# Altium PCB PCB_uz_ext_voltage_measurement_800v.PcbDoc
Units mm, origin at the board's own origin, x right, y up, seen from the top; angles counter-clockwise.
Board outline 124 x 82.6 mm, 2 copper layers (Top Copper, Bottom Copper), stack 1.57 mm thick; 52 components, 22 nets, 189 pads, 25 vias.
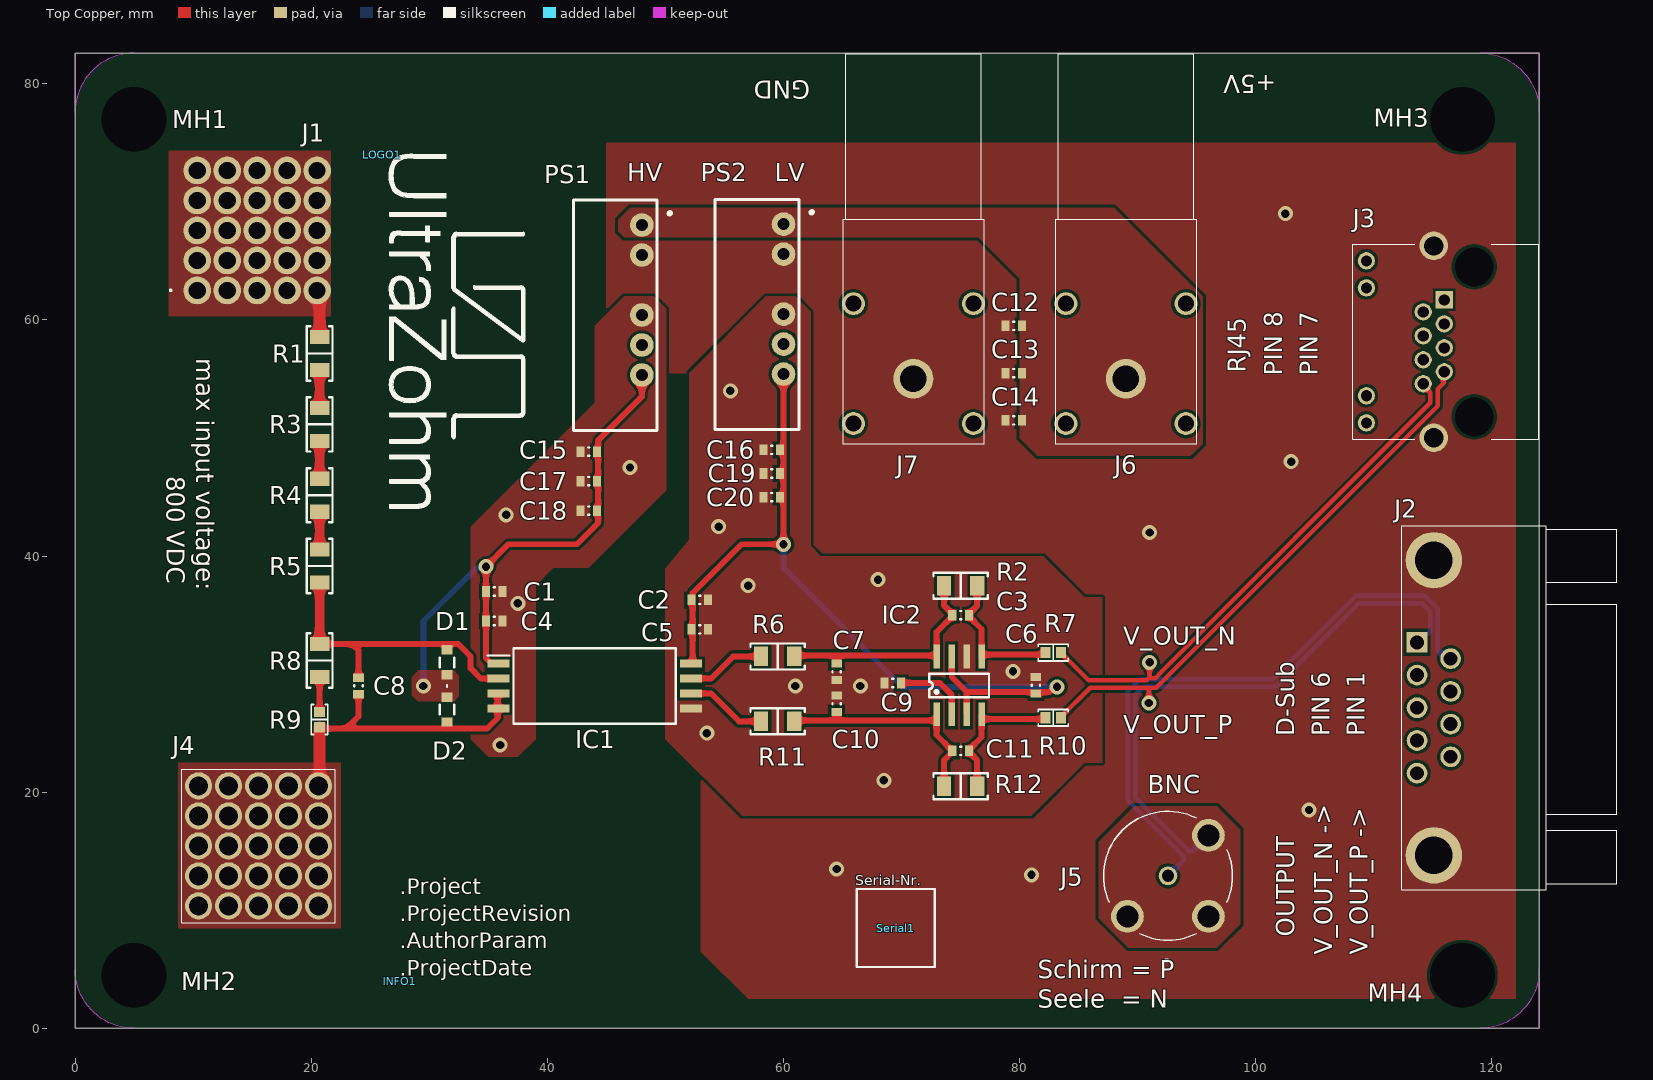
[diagram p0: Top Copper view]
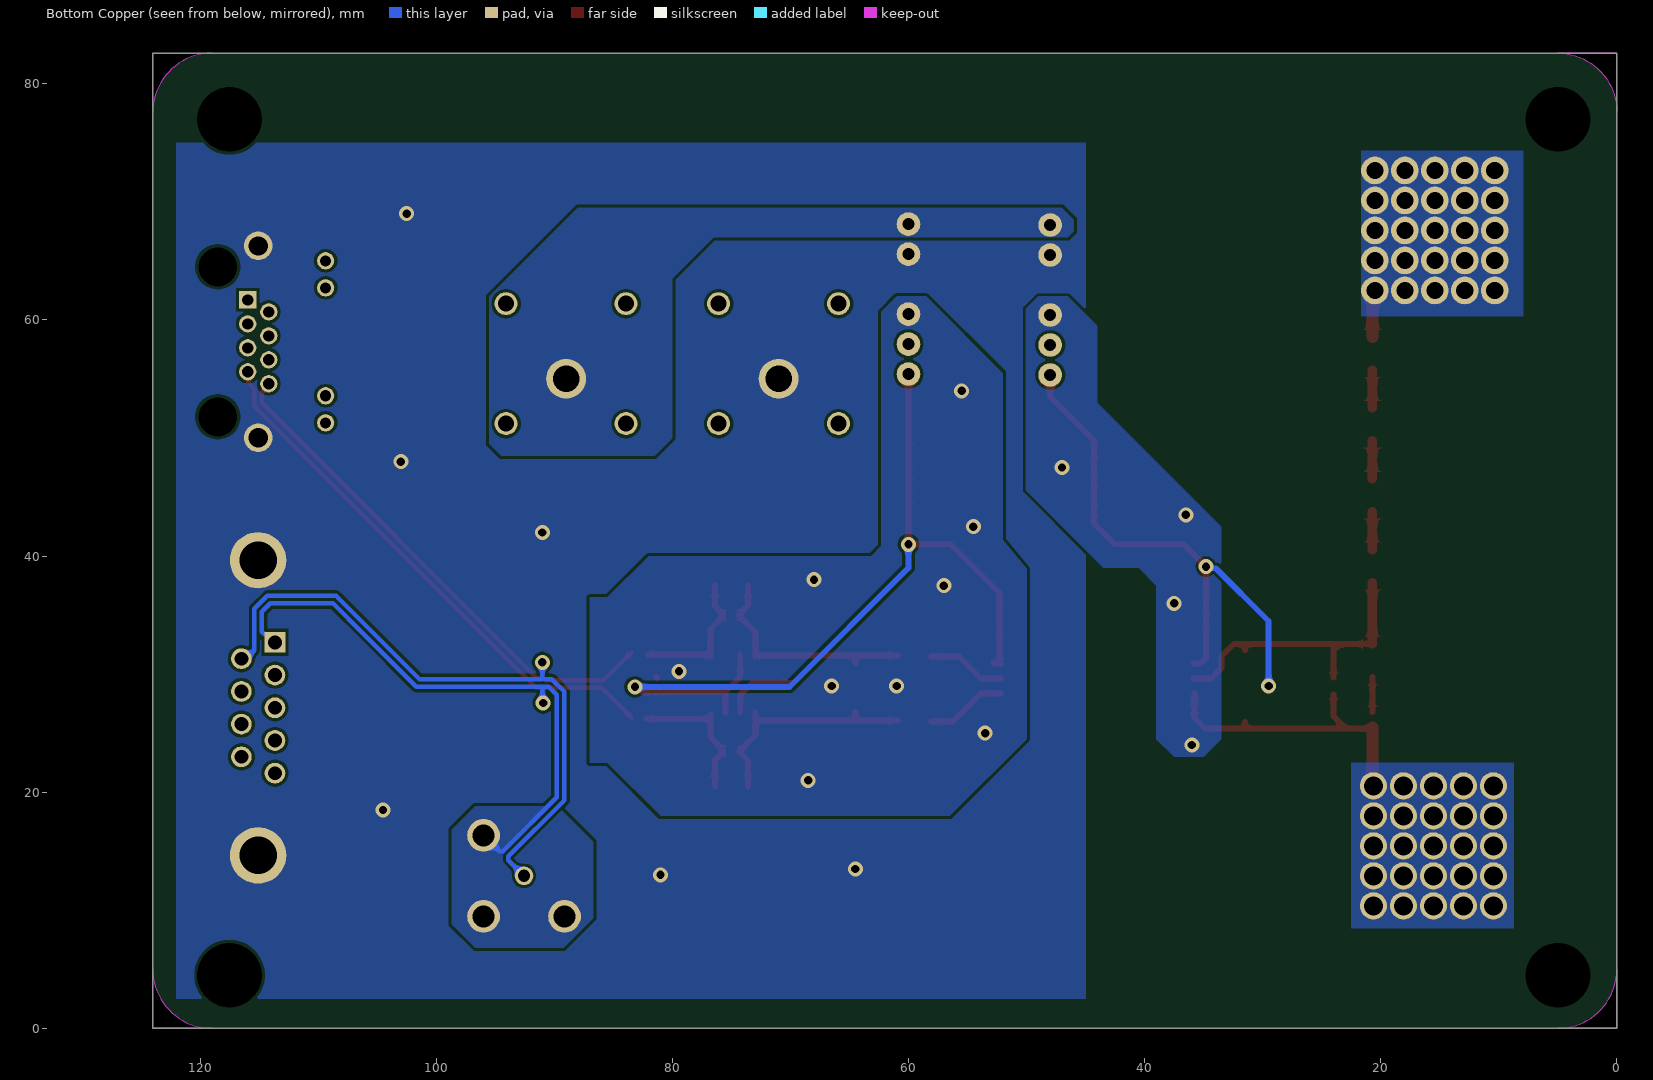
[diagram p1: Bottom Copper view, seen from below]

## Layer stack, top to bottom
Top Mask: solder mask 0.015, Solder Resist, Dk 3.8
Top Copper: signal copper 0.035
Core: core 1.5, FR-4, Dk 4.5
Bottom Copper: signal copper 0.035
Bottom Mask: solder mask 0.015, Solder Resist, Dk 3.8

## Board outline
0,0 124,0 124,82.6 0,82.6
cut-out: 0,82.6 5,82.6 ccw(c5,77.6) 0,77.6
cut-out: 119,82.6 cw(c119,77.6) 124,77.6 124,82.6
cut-out: 119,0 124,0 124,5 cw(c119,5)
cut-out: 0,0 5,0 cw(c5,5) 0,5

## Design rules (kind name [scope] priority, off if disabled: settings)
Clearance [All] p1: gap=0.254 ignorepadtopadclearanceinfootprint=FALSE except(0: Arc-Hole Track-Hole SMDPad-Hole THPad-Hole Via-Hole Fill-Hole Poly-Hole Region-Hole Text-Hole)
DiffPairsRouting [All] p1: maxlimit=0.254 minlimit=0.254 mostfreqgap=0.254 toplayer_minwidth=0.381 toplayer_maxwidth=0.381 toplayer_prefwidth=0.381 bottomlayer_minwidth=0.381 bottomlayer_maxwidth=0.381 bottomlayer_prefwidth=0.381 maxuncoupledlength=12.7
HoleSize [All] p1: absolutevalues=TRUE maxlimit=6.3 minlimit=0.15 maxpercent=80.000 minpercent=20.000
MinimumSolderMaskSliver [All] p1 off: minsoldermaskwidth=0.1
PolygonConnect PolygonConnect_2 [InNet('NetC5_1')] p1: connectstyle=Direct reliefconductorwidth=0.254 reliefentries=4 polygonreliefangle="90 Angle" airgapwidth=0.254
PolygonConnect PolygonConnect_1 [InNet('NetJ1_1')] p2: connectstyle=Direct reliefconductorwidth=0.254 reliefentries=4 polygonreliefangle="90 Angle" airgapwidth=0.254
PolygonConnect [All] p3: connectstyle=Direct reliefconductorwidth=0.254 reliefentries=4 polygonreliefangle="90 Angle" airgapwidth=0.254
RoutingVias [All] p1: holewidth=0.711 width=1.27 viastyle="Through Hole" minholewidth=0.711 minwidth=1.27 maxholewidth=0.711 maxwidth=1.27
SilkToSilkClearance [All] p1 off: silktosilkclearance=0.254
SilkToSolderMaskClearance [IsPad] p1 off: minsilkscreentomaskgap=0.254 clearancetoexposedcopper=TRUE
SolderMaskExpansion [All] p1: expansion=0.102 istentingtop=FALSE
Width [All] p1: maxlimit=1 minlimit=0.254 preferedwidth=0.5
25 further rules are at their usual default settings.

## Classes and differential pairs
component class "VoltageDivider & Diff AMP": C1 C2 C3 C4 C5 C6 C7 C8 C9 C10 C11 D1 D2 IC1 IC2 R1 R2 R3 R4 R5 R6 R7 R8 R9 R10 R11 R12
component class TopSheet: INFO1 J1 J2 J3 J4 J5 LOGO1 MH1 MH2 MH3 MH4 Serial1
component class Spannungswandlung: C12 C13 C14 C15 C16 C17 C18 C19 C20 J6 J7 PS1 PS2
differential pair V_OUT: +V_OUT_P -V_OUT_N

## Components (designator, comment, footprint, x,y, rotation, side; value= is the part's Value field where it differs from the comment)
C1 "1 µF" C_0603 35.5,37 r0 top
C2 "1 µF" C_0603 52.904,36.296 r180 top
C3 "1 pF" C_0603 75,35 r0 top
C4 "100 nF" C_0603 35.5,34.5 r0 top
C5 "100 nF" C_0603 52.904,33.796 r180 top
C6 "100 nF" C_0603 81.371,29.069 r90 top
C7 "1 µF" C_0603 64.5,30.2 r90 top
C8 "100 pF" C_0603 24,29 r90 top
C9 "1 µF" C_0603 69.243,29.257 r0 top
C10 "1 µF" C_0603 64.5,27.5 r90 top
C11 "1 pF" C_0603 75,23.5 r0 top
C12 "1 µF" C_0603 79.5,59.5 r180 top
C13 "1 µF" C_0603 79.5,55.5 r180 top
C14 "1 µF" C_0603 79.5,51.5 r180 top
C15 "10 µF" C_0603 43.5,48.85 r180 top
C16 "10 µF" C_0603 59,49 r180 top
C17 "1 µF" C_0603 43.5,46.35 r180 top
C18 "1 µF" C_0603 43.5,43.85 r180 top
C19 "1 µF" C_0603 59,47 r180 top
C20 "1 µF" C_0603 59,45 r180 top
D1 "1SS356VMFHTE-17" 1SS356VMFHTE17 31.5,31 r180 top
D2 "1SS356VMFHTE-17" 1SS356VMFHTE17 31.5,27 r0 top
IC1 "AMC1411QDWLRQ1" SOIC127P1725X403-8N 44,29 r0 top
IC2 "ADA4940-1ARZ-R7" SOIC-8-N 72.96,26.6 r90 top value="differential ADC driver"
INFO1 "Design Information" Design_info 27.5,4 r0 top
J1 "7460719_M8" 7460719 10.34,62.5 r0 top
J2 "2311765-2" 23117652 113.66,32.695 r90 top
J3 "RJHSE-5381" RJHSE-5381 124.089,50.15 r90 top
J4 "7461098_M6" 7461098 10.46,10.38 r0 top
J5 "BNC5-J-P-GN-ST-TH2D_new" BNC5-J-P-GN-ST-TH2D_new 92.695,12.826 r90 top
J6 "FCR7350R, PCB mount 4mm jack, RED" FCR7350 89,66 r90 top value="PCB mount 4mm jack, Red FCR7350R, 1000V, 24A"
J7 "FCR7350B, PCB mount 4mm jack, BLACK" FCR7350 71,66 r90 top value="PCB mount 4mm jack, Black	FCR7350B, 1000V, 24A"
LOGO1 "UZ Logo" UZ_Logo_small 26,74 r270 top value=Logo
MH1 "Mounting_Hole_M5" "Mounting Hole (M5)" 5,77 r90 top
MH2 "Mounting_Hole_M5" "Mounting Hole (M5)" 5,4.5 r90 top
MH3 "Mounting_Hole_M5" "Mounting Hole (M5)" 117.5,77 r90 top
MH4 "Mounting_Hole_M5" "Mounting Hole (M5)" 117.5,4.5 r90 top
PS1 "TMA 2405S" "TMA 2405D" 49.3,70.14 r270 top
PS2 "TMA 2405S" "TMA 2405D" 61.3,70.22 r270 top
R1 "1M" "RES 1206_3216" 20.703,57.156 r90 top
R2 "2k 0.1%" "RES 1206_3216" 75,37.5 r0 top value=2k
R3 "1M" "RES 1206_3216" 20.703,51.156 r90 top
R4 "1M" "RES 1206_3216" 20.703,45.156 r90 top
R5 "1M" "RES 1206_3216" 20.703,39.156 r90 top
R6 "1k 0.1%" "RES 1206_3216" 59.5,31.5 r0 top value=1k
R7 "49R9" "RES 0603_1608" 82.842,31.825 r0 top
R8 "10k" "RES 1206_3216" 20.703,31.156 r90 top
R9 "25R2" "RES 0603_1608" 20.703,26.156 r90 top
R10 "49R9" "RES 0603_1608" 82.842,26.316 r0 top
R11 "1k 0.1%" "RES 1206_3216" 59.5,26 r0 top value=1k
R12 "2k 0.1%" "RES 1206_3216" 75,20.5 r0 top value=2k
Serial1 "Serialnumber 6.3 x 6.3 mm" SERIAL_6.3X6.3MM 69.5,8.5 r0 top value=REV

## Footprints (in the part's own frame and the unit in brackets; to place one, negate y for a bottom-side part, rotate by r counter-clockwise, add the part's x,y. Pads: shape width x height; smd on the part's side, far side on the other; paste and mask are expansions set on the pad)
1SS356VMFHTE17 [mm]
  rect 0.9x0.8 smd: 1(0,1.05) 2(0,-1.05)
  silkscreen extent -0.63,-0.4 0.63,2
7460719 [mm]
  round 2.35 hole 1.45: 1(0,0) 2(2.54,0) 3(5.08,0) 4(7.62,0) 5(10.16,0) 6(10.16,2.54) 7(7.62,2.54) 8(5.08,2.54) 9(2.54,2.54) 10(0,2.54) 11(0,5.08) 12(2.54,5.08) 13(5.08,5.08) 14(7.62,5.08) 15(10.16,5.08) 16(10.16,7.62) 17(7.62,7.62) 18(5.08,7.62) 19(2.54,7.62) 20(0,7.62) 21(0,10.16) 22(2.54,10.16) 23(5.08,10.16) 24(7.62,10.16) 25(10.16,10.16)
  silkscreen extent -2.3,-0.05 -2.2,0.05, body extent -1.42,-1.42 11.58,11.58, height 20.6
7461098 [mm]
  round 2.3 hole 1.6: 1(0,0) 2(2.54,0) 3(5.08,0) 4(7.62,0) 5(10.16,0) 6(0,2.54) 7(2.54,2.54) 8(5.08,2.54) 9(7.62,2.54) 10(10.16,2.54) 11(0,5.08) 12(2.54,5.08) 13(5.08,5.08) 14(7.62,5.08) 15(10.16,5.08) 16(0,7.62) 17(2.54,7.62) 18(5.08,7.62) 19(7.62,7.62) 20(10.16,7.62) 21(0,10.16) 22(2.54,10.16) 23(5.08,10.16) 24(7.62,10.16) 25(10.16,10.16)
  silkscreen extent -1.42,-1.42 11.58,11.58, body extent -1.42,-1.42 11.58,11.58, height 15.6
23117652 [mm]
  rect 1.755x1.755 hole 1.17: 1(0,0)
  round 1.755 hole 1.17: 2(-2.77,0) 3(-5.54,0) 4(-8.311,0) 5(-11.081,0) 6(-1.385,-2.84) 7(-4.155,-2.84) 8(-6.925,-2.84) 9(-9.695,-2.84)
  round 4.77 hole 3.18: MH1(-18.041,-1.42) MH2(6.96,-1.42)
  silkscreen extent -20.95,-16.92 9.86,1.28, body extent -21.03,-16.93 9.78,1.27, height 12.63
BNC5-J-P-GN-ST-TH2D_new [mm] "Footprint"
  round 1.575 hole 1.05: 1(0.094,0.135)
  round 2.775 hole 1.85: S_1(-3.336,3.565) S_2(-3.336,-3.295) S_3(3.524,-3.295)
  silkscreen extent -7.19,-5.33 5.55,5.6
C_0603 [mm] "Chip Capacitor, Body 1.6x0.8mm, Height 1.0mm, IPC High Density"
  rect 0.7x0.9 smd: 1(-0.7,0) 2(0.7,0)
  silkscreen extent -0.05,-0.35 0.05,0.35, body extent -0.87,-0.47 0.88,0.48, height 1
Design_info [mm] "Design information about the PCB"
FCR7350 [mil]
  round 132.87 hole 88.58: 1(-432.22,0)
  round 76.5 hole 53.15: 2(-581.83,200) 3(-581.83,-200) 4(-181.83,-200) 5(-181.83,200)
  silkscreen extent -649,-236 652,236, body extent -648,-236 651,236, height 485
"Mounting Hole (M5)" [mm]
  round 5 hole 5.5: ""(0,0)
"RES 0603_1608" [mm] "Chip Resistor, 2-Leads, Body 1.60x0.80mm, IPC Medium Density"
  rect 0.85x0.95 smd: 1(-0.65,0) 2(0.65,0)
  silkscreen extent -1.27,-0.7 1.27,0.7, body extent -0.8,-0.4 0.8,0.4, height 0.45
"RES 1206_3216" [mm] "Chip Resistor, 2-Leads, Body 3.13x1.55mm, IPC Medium Density"
  rect 1.2x1.65 smd: 1(-1.4,0) 2(1.4,0)
  silkscreen extent -2.3,-1.1 2.3,1.1, body extent -1.6,-0.8 1.6,0.8, height 0.6
RJHSE-5381 [mm] "Ethernet-Steckverbinder R/A RJ45 SHIELDED 8 CONT Y/G LEDS"
  rect 1.462x1.462 hole 0.94: 1(11.552,8.129)
  round 1.462 hole 0.94: 2(10.537,9.909) 3(9.522,8.129) 4(8.507,9.909) 5(7.492,8.129) 6(6.478,9.909) 7(5.462,8.129) 8(4.447,9.909) 9(14.86,14.729) 10(12.569,14.729) 11(3.43,14.729) 12(1.139,14.729)
  round 2.43 hole 1.62: MH1(16.13,9.019) MH2(-0.131,9.019)
  round 1.65 hole 3.3 unplated: MH3(14.35,5.589) MH4(1.65,5.589)
  silkscreen extent -0.26,0.13 16.26,15.88, body extent -0.28,-0.51 16.28,15.93, height 14.74
SERIAL_6.3X6.3MM [mm]
  silkscreen extent -3.3,-3.3 3.3,3.3
SOIC127P1725X403-8N [mm]
  rect 1.85x0.65 smd: 1(-8.15,1.905) 2(-8.15,0.635) 3(-8.15,-0.635) 4(-8.15,-1.905) 5(8.15,-1.905) 6(8.15,-0.635) 7(8.15,0.635) 8(8.15,1.905)
  silkscreen extent -9.08,-3.2 6.88,3.2, body extent -8.62,-3.2 8.62,3.2, height 4.03
SOIC-8-N [mm] "SMD Small Outline IC 8 pin Narrow"
  rect 2x0.55 smd: 1(0,0) 2(0,-1.27) 3(0,-2.54) 4(0,-3.81) 5(4.9,-3.81) 6(4.9,-2.54) 7(4.9,-1.27) 8(4.9,0)
  silkscreen extent 1.46,-4.44 3.44,0.64, body extent -0.63,-4.32 5.56,0.51, height 1.7
"TMA 2405D" [mm] "Isolierte DC/DC-Wandler – Durchsteckmontage Product Type: DC/DC; Package Style: SIP; Output Power (W): 1; Input Voltage: 24 VDC +/-10%; Output 1 (Vdc): 5; Output 2 (Vdc): -5; Output 3 (Vdc): N/A"
  round 2 hole 1: 1(2.1,-1.3) 2(4.64,-1.3) 4(9.72,-1.3) 5(12.26,-1.3) 6(14.8,-1.3)
  silkscreen extent 0,-7.1 19.5,1.1, body extent 0.08,-7.12 19.5,-0.08, height 11.1
UZ_Logo_small [mm] "logo width 3cm"
  silkscreen extent -0.05,0.57 29.94,12.12

## Part data
C1 C2 C7 C9 C10 C17 C18 C19 C20: library part CL10A105KB8NNNC, "50V 1uF X5R ±10% 0603  Multilayer Ceramic Capacitors MLCC - SMD/SMT ROHS", Device Package=0603, LCSC Part Number=C15849, Manufacturer="Samsung Electro-Mechanics", Operating Temperature="-55 - 85°C", Supplier Part Number 1=187-CL10A105KB8NNNC, Tolerance="10 %", Voltage Rating="50 VDC", Component Type="Capacitor 0603", ComponentLink1Description=Datasheet, ComponentLink1URL=https://datasheet.lcsc.com/lcsc/1810261812_Samsung-Electro-Mechanics-CL10A105KB8NNNC_C15849.pdf, Created from=MGremer, Created On="20.12.2020 13:54:13", Last Updated="28.11.2022 17:23:01", Live Cycle Status=1, Manufacturer Part Number=CL10A105KB8NNNC, Mounting Type=SMD, PartID=5, Series=M, Stock number="Labor SMD Container", Supplier 1=Mouser, Type=Capacitor
C3 C11: library part KGM15ACG1H1R0BT, "Multilayer Ceramic Capacitors MLCC - SMD/SMT 50V 1pF C0G 0603 +/-.1pF", Device Package=0603, Manufacturer="KYOCERA AVX", Operating Temperature="-55 to +125°C", Supplier Part Number 1=581-KGM15ACG1H1R0BT, Tolerance=10%, Voltage Rating="50 VDC", Component Type="Capacitor 0603", ComponentLink1Description=Datasheet, ComponentLink1URL=https://www.mouser.de/datasheet/2/40/C0GNP0_KGM-3216332.pdf, Created from=TGaupp, Created On="13.02.2024 08:51:22", Last Updated="13.02.2024 08:51:22", Live Cycle Status=1, Manufacturer Part Number=KGM15ACG1H1R0BT, Mounting Type=SMD, PartID=147, Series=C0G, Supplier 1=Mouser, Type=Capacitor
C4 C5 C6: library part C0603C104K9PACTU, "Capacitor 0603, 6.3 VDC, 100 nF, X5R", Device Package=0603, Manufacturer=KEMET, Operating Temperature="-55 - 85°C", Supplier Part Number 1=80-C0603C104K9P, Tolerance="10 %", Voltage Rating="6.3 VDC", Component Type="Capacitor 0603", ComponentLink1Description=Datasheet, ComponentLink1URL=https://www.mouser.de/datasheet/2/212/KEM_C1006_X5R_SMD-1103249.pdf, Created from=MGremer, Created On="20.12.2020 13:54:13", Last Updated="20.01.2021 13:57:36", Live Cycle Status=1, Manufacturer Part Number=C0603C104K9PACTU, Mounting Type=SMD, PartID=70, Series="SMD Comm X5R", Stock number="not stored", Supplier 1=Mouser, Type=Capacitor
C8: library part 885012006057, "Capacitor 0603, 50 VDC, 100 pF, C0G", Device Package=0603, Manufacturer="Wuerth Elektronik", Operating Temperature="-55 - 125°C", Supplier Part Number 1=710-885012006057, Tolerance="5 %", Voltage Rating="50 VDC", Component Type="Capacitor 0603", ComponentLink1Description=Datasheet, ComponentLink1URL=https://www.mouser.de/datasheet/2/445/885012006057-1727261.pdf, Created from=MGremer, Created On="20.12.2020 13:54:13", Last Updated="20.12.2020 16:24:16", Live Cycle Status=1, Manufacturer Part Number=885012006057, Mounting Type=SMD, PartID=44, Series=WCAP-CSGP, Stock number="not stored", Supplier 1=Mouser, Type=Capacitor
C12 C13 C14: library part CL10A105KB8NNNC, "50V 1uF X5R ±10% 0603  Multilayer Ceramic Capacitors MLCC - SMD/SMT ROHS", Device Package=0603, LCSC Part Number=C15849, Manufacturer="Samsung Electro-Mechanics", Operating Temperature="-55 - 85°C", Tolerance="10 %", Voltage Rating="50 VDC", Component Type="Capacitor 0603", ComponentLink1Description=Datasheet, ComponentLink1URL=https://datasheet.lcsc.com/lcsc/1810261812_Samsung-Electro-Mechanics-CL10A105KB8NNNC_C15849.pdf, Created from=MGremer, Created On="20.12.2020 13:54:13", Last Updated="28.11.2022 17:23:01", Live Cycle Status=1, Manufacturer Part Number=CL10A105KB8NNNC, Mounting Type=SMD, PartID=5, Series=M, Stock number="Labor SMD Container", Supplier 1=LCSC, Supplier Part Number 1=C15849, Type=Capacitor
C15: library part CL10A106MO8NQNC, "Capacitor 0603, 16 VDC, 10 µF, X5R", Device Package=0603, LCSC Part Number=C92487, Manufacturer="Samsung Electro-Mechanics", Operating Temperature="-55 - 85°C", Supplier Part Number 1=187-CL10A106MO8NQNC, Tolerance="20 %", Voltage Rating="16 VDC", Component Type="Capacitor 0603", ComponentLink1Description=Datasheet, ComponentLink1URL=https://datasheet.lcsc.com/lcsc/1810261909_Samsung-Electro-Mechanics-CL10A106MO8NQNC_C92487.pdf, Created from=AGeiger, Created On="22.08.2022 13:56:44", Last Updated="03.09.2022 10:50:43", Live Cycle Status=1, Manufacturer Part Number=CL10A106MO8NQNC, Mounting Type=SMD, PartID=101, Series=X5R, Supplier 1=Mouser, Type=Capacitor
C16: library part CL10A106MO8NQNC, "Capacitor 0603, 16 VDC, 10 µF, X5R", Device Package=0603, LCSC Part Number=C92487, Manufacturer="Samsung Electro-Mechanics", Operating Temperature="-55 - 85°C", Supplier Part Number 1=7882893P, Tolerance="20 %", Voltage Rating="16 VDC", Component Type="Capacitor 0603", ComponentLink1Description=Datasheet, ComponentLink1URL=https://datasheet.lcsc.com/lcsc/1810261909_Samsung-Electro-Mechanics-CL10A106MO8NQNC_C92487.pdf, Created from=AGeiger, Created On="22.08.2022 13:56:44", Last Updated="03.09.2022 10:50:43", Live Cycle Status=1, Manufacturer Part Number=CL10A106MO8NQNC, Mounting Type=SMD, PartID=101, Series=X5R, Supplier 1=Rs, Type=Capacitor
D1 D2: "Diode", Manufacturer_Name="ROHM Semiconductor", Mouser Part Number=755-1SS356VMFHTE-17, Datasheet Link=https://fscdn.rohm.com/en/products/databook/datasheet/discrete/diode/switching/1ss355vmfhte-17-e.pdf, Height=0.9mm, Manufacturer_Part_Number=1SS356VMFHTE-17, Mouser Price/Stock=https://www.mouser.co.uk/ProductDetail/ROHM-Semiconductor/1SS356VMFHTE-17?qs=doiCPypUmgG12xHjyvfQdg%3D%3D, Supplier 1=Mouser, Supplier Part Number 1=755-1SS356VMFHTE-17
IC1: "Integrated Circuit", Manufacturer_Name="Texas Instruments", Mouser Part Number=595-AMC1411QDWLRQ1, Datasheet Link=https://www.ti.com/lit/ds/symlink/amc1411-q1.pdf?HQS=dis-mous-null-mousermode-dsf-pf-null-wwe&ts=1671451088275&ref_url=https%253A%252F%252Fwww.mouser.in%252F, Height=4.034mm, Manufacturer_Part_Number=AMC1411QDWLRQ1, Mouser Price/Stock=https://www.mouser.co.uk/ProductDetail/Texas-Instruments/AMC1411QDWLRQ1?qs=Rp5uXu7WBW9VgWcI1l5sjg%3D%3D, Supplier 1=Mouser, Supplier Part Number 1=595-AMC1411QDWLRQ1
IC2: "Differential ADC Driver", Device Package=SOIC-8, Manufacturer="Analog Devices", Operating Temperature="-40 - 105 °C", Package Reference=SOIC-N-8, Supplier Part Number 1=584-ADA4940-1ARZ-R7, Best.-Nr.="Farnell 209-6178", Channels=1, Class I=Analog, Class II="Fully Differential ADC Drivers (-40-125°C)", Component Type=ADC, ComponentLink1Description=Datasheet, ComponentLink1URL=https://www.mouser.de/datasheet/2/609/ADA4940-1_4940-2-878284.pdf, Created from=MGremer, Created On="15.01.2021 12:16:53", Datasheet="DSO11449, Ver. Aug 2000", Last edited="04.01.2007 10:14", Last Updated="22.11.2021 15:19:18", Live Cycle Status=1, Manufacturer Part Number=ADA4940-1ARZ-R7, Mounting Type=SMD, PartID=3, Resolution=-, Stock number="not stored", Supplier 1=Mouser, Type=ADC
INFO1: "Design InformationS", Manufacturer=UltraZohm, Supplier Part Number 1=-, Component Type="Design Information", ComponentLink1Description=https://docs.ultrazohm.com/, ComponentLink1URL=homepage, Created from=MGremer, Created On="03.11.2021 09:04:23", Last Updated="03.11.2021 09:28:34", Live Cycle Status=1, Manufacturer Part Number="Design Information", PartID=12, Supplier 1=-, Type="Design Information"
J1: "Connector", Manufacturer_Name="Wurth Elektronik", Manufacturer_Part_Number=7460719, Mouser Part Number=710-7460719, Datasheet Link=https://www.mouser.com/datasheet/2/445/7460719-1723637.pdf, Height=20.5mm, Mouser Price/Stock=https://www.mouser.co.uk/ProductDetail/Wurth-Elektronik/7460719?qs=lykWx4dhCCHoCGzpKhOnqA%3D%3D, Supplier 1=Mouser, Supplier Part Number 1=710-7460719
J2: "Connector D-Sub 9 Pin Female", Manufacturer_Name="TE Connectivity", Mouser Part Number=571-2311765-2, Arrow Part Number=2311765-2, Arrow Price/Stock=https://www.arrow.com/en/products/2311765-2/te-connectivity?region=nac, Datasheet Link=https://www.te.com/commerce/DocumentDelivery/DDEController?Action=showdoc&DocId=Customer+Drawing%7F2311765%7FD%7Fpdf%7FEnglish%7FENG_CD_2311765_D.pdf%7F2311765-2, Height=12.8mm, Manufacturer_Part_Number=2311765-2, Mouser Price/Stock=https://www.mouser.co.uk/ProductDetail/TE-Connectivity/2311765-2?qs=rrS6PyfT74frdzrH7SJRfg%3D%3D, Supplier 1=Mouser, Supplier Part Number 1=571-2311765-2
J3: "Connector Ethernet R/A RJ45 SHIELDED 8 CONT Y/G LEDS", Supplier Part Number 1=523-RJHSE-5381, Supplier 1=Mouser
J4: "Connector", Manufacturer_Name="Wurth Elektronik", Manufacturer_Part_Number=7461098, Mouser Part Number=710-7461098, Datasheet Link=https://katalog.we-online.com/em/datasheet/7461098.pdf, Height=15.5mm, Mouser Price/Stock=https://www.mouser.co.uk/ProductDetail/Wurth-Elektronik/7461098?qs=lykWx4dhCCGHHs7z4oM%2FDg%3D%3D, Supplier 1=Mouser, Supplier Part Number 1=710-7461098
J5: "BNC Connector", Supplier Part Number 1=200-BNC5JPGNSTTH2D, Supplier 1=Mouser
J6: library part FCR7350R, "FCR7350B, 1000V, 24A, RED", Device Package=THT, Manufacturer=Cliff, Operating Temperature="-40°C - 80°C", Supplier Part Number 1=3185-FCR7350R-ND, Component Type="PCB mount 4mm jack, Red", ComponentLink1Description=datasheet, ComponentLink1URL=https://www.cliffuk.co.uk/products/testleads/sockets/S16NPC.pdf, ComponentLink2Description=drawing, ComponentLink2URL=https://media.digikey.com/pdf/Data%20Sheets/Cliff%20Electronic%20LTD%20PDF's/FCR7350_Drawing.pdf, Created from=DHufnagel, Created On="13.06.2022 10:18:11", Last Updated="28.06.2022 13:58:37", Live Cycle Status=1, Manufacturer Part Number=FCR7350R, Minimum Order=1, Mounting Type=THT, PartID=7, Series=S16N-PC, Stock number="not stored", Supplier 1=Digi-Key, Supplier 2=farnell, Supplier Part Number 2=1854508, Type="PCB mount 4mm jack, Red FCR7350R, 1000V, 24A"
J7: library part FCR7350B, "FCR7350B, 1000V, 24A, BLACK", Device Package=THT, Manufacturer=Cliff, Operating Temperature="-40°C - 80°C", Supplier Part Number 1=3185-FCR7350B-ND, Component Type="PCB mount 4mm jack, Black", ComponentLink1Description=datasheet, ComponentLink1URL=https://www.cliffuk.co.uk/products/testleads/sockets/S16NPC.pdf, ComponentLink2Description=drawing, ComponentLink2URL=https://media.digikey.com/pdf/Data%20Sheets/Cliff%20Electronic%20LTD%20PDF's/FCR7350_Drawing.pdf, Created from=DHufnagel, Created On="13.06.2022 10:18:11", Last Updated="28.06.2022 13:58:37", Live Cycle Status=1, Manufacturer Part Number=FCR7350B, Minimum Order=1, Mounting Type=THT, PartID=6, Series=S16N-PC, Stock number="not stored", Supplier 1=Digi-Key, Supplier 2=farnell, Supplier Part Number 2=1854507, Type="PCB mount 4mm jack, Black	FCR7350B, 1000V, 24A"
LOGO1: library part "Logo small", Manufacturer=UltraZohm, Supplier Part Number 1=-, Component Type=Logo, ComponentLink1Description=https://docs.ultrazohm.com/, ComponentLink1URL=homepage, Created=Jan2021_Liegmann, Created from=MGremer, Created On="03.11.2021 09:04:23", Last Updated="03.11.2021 09:05:50", Live Cycle Status=1, Manufacturer Part Number="Logo small", PartID=10, Supplier 1=-, Type=Logo
MH1 MH2 MH3 MH4: "Mounting Hole"
PS1 PS2: "Isolierte DC/DC-Wandler – Durchsteckmontage Product Type: DC/DC; Package Style: SIP; Output Power (W): 1; Input Voltage: 24 VDC +/-10%; Output 1 (Vdc): 5;", Supplier Part Number 1=495-TMA-2405S, Supplier 1=Mouser
R1 R3 R4 R5: library part RS73F2BTTD1004B, "SMD resistor 1MOhms .1% 330mW 25PPM/C", Device Package=1206, Manufacturer="KOA Speer", Supplier Part Number 1=660-RS73F2BTTD1004B, Tolerance=0.1%, Component Type="SMD resistor", ComponentLink1Description=Datasheet, ComponentLink1URL=https://www.koaspeer.com/pdfs/RS73.pdf, Created from=TGaupp, Created On="30.01.2024 08:46:50", Last Updated="30.01.2024 08:46:50", Live Cycle Status=1, Manufacturer Part Number=RS73F2BTTD1004B, Mounting Type=SMD, PartID=318, Stock number="not stored", Supplier 1=Mouser, Type=Resistor
R2 R12: library part TNPW12062K00BEEA, "SMD resistor 2Kohms .1% 400mW 25ppm", Device Package=1206, Manufacturer=Vishay, Supplier Part Number 1=71-TNPW12062K00BEEA, Tolerance=0.1%, Component Type="SMD resistor", ComponentLink1Description=Datasheet, ComponentLink1URL=https://www.vishay.com/docs/28758/tnpw_e3.pdf, Created from=TGaupp, Created On="12.02.2024 09:48:36", Last Updated="12.02.2024 09:48:36", Live Cycle Status=1, Manufacturer Part Number=TNPW12062K00BEEA, Mounting Type=SMD, PartID=323, Stock number="not stored", Supplier 1=Mouser, Type=Resistor
R6 R11: library part ERA-8AEB102V, "SMD resistor 1/4W 1.0Kohm 0.1% 25ppm", Device Package=1206, LCSC Part Number=C2079586, Manufacturer=Panasonic, Supplier Part Number 1=667-ERA-8AEB102V, Tolerance=0.1%, Component Type="SMD resistor", ComponentLink1Description=Datasheet, ComponentLink1URL=https://www.mouser.de/datasheet/2/315/AOA0000C307-1149632.pdf, Created from=TGaupp, Created On="08.08.2023 13:03:51", Last Updated="08.08.2023 13:03:51", Live Cycle Status=1, Manufacturer Part Number=ERA-8AEB102V, Mounting Type=SMD, PartID=292, Stock number="not stored", Supplier 1=Mouser, Type=Resistor
R7 R10: library part RC0603FR-0749R9L, "100mW Thick Film Resistors ±100ppm/℃ ±1% 49.9Ω 0603 Chip Resistor - Surface Mount ROHS", Device Package=0603, LCSC Part Number=C114625, Manufacturer=YAGEO, Tolerance=1%, Component Type="SMD resistor", ComponentLink1Description=Datasheet, ComponentLink1URL=https://datasheet.lcsc.com/lcsc/2304140030_YAGEO-RC0603FR-0749R9L_C114625.pdf, Created from=AGeiger, Created On="14.06.2023 17:42:26", Last Updated="14.06.2023 17:42:26", Live Cycle Status=1, Manufacturer Part Number=RC0603FR-0749R9L, Mounting Type=SMD, PartID=277, Supplier 1=LCSC, Supplier Part Number 1=C114625, Type=Resistor
R8: library part RS73F2BTTD1002B, "SMD resistor 10kOhms .1% 330mW 25PPM/C", Device Package=1206, Manufacturer="KOA Speer", Supplier Part Number 1=660-RS73F2BTTD1002B, Tolerance=0.1%, Component Type="SMD resistor", ComponentLink1Description=Datasheet, ComponentLink1URL=https://www.koaspeer.com/pdfs/RS73.pdf, Created from=TGaupp, Created On="30.01.2024 09:03:35", Last Updated="30.01.2024 09:03:35", Live Cycle Status=1, Manufacturer Part Number=RS73F2BTTD1002B, Mounting Type=SMD, PartID=320, Stock number="not stored", Supplier 1=Mouser, Type=Resistor
R9: library part RT0603BRD0725R2L, "SMD resistor 0.1%", Device Package=0603, Manufacturer=YAGEO, Supplier Part Number 1=603-RT0603BRD0725R2L, Tolerance=0.1%, Component Type="SMD resistor", ComponentLink1Description=Datasheet, ComponentLink1URL=https://www.mouser.de/datasheet/2/447/PYu_RT_1_to_0_01_RoHS_L_11-1669912.pdf, Created from=DHufnagel, Created On="14.12.2020 16:17:14", Last Updated="02.03.2021 14:07:32", Live Cycle Status=1, Manufacturer Part Number=RT0603BRD0725R2L, Mounting Type=SMD, PartID=213, Stock number="not stored", Supplier 1=Mouser, Type=Resistor
Serial1: library part "Serial Number", "Serial Number", Manufacturer=UltraZohm, Supplier Part Number 1=-, Component Type="Serial Number", ComponentLink1Description=https://docs.ultrazohm.com/, ComponentLink1URL=homepage, Created=2018_09_18_AGeiger, Created from=MGremer, Created On="03.11.2021 09:04:23", Last Updated="03.11.2021 09:28:34", Live Cycle Status=1, Manufacturer Part Number="Serial Number", PartID=11, Supplier 1=-, Type="Serial Number"

## Via types
v1: diameter 1.27, hole 0.711, Top Copper to Bottom Copper, 25 vias

## Nets (pads, with @x,y where several pads share a name; then routed paths per layer and width w, separated by ;. In a path a pad name is that pad's centre, name@x,y a point inside that pad or via, vN(x,y) a via of type N, cw(c..) or ccw(c..) an arc to the next point about the centre after c; other vN are vias at no path point)
24V_IN: C12.1 C13.1 C14.1 J6.1 PS1.1 PS2.1
+5V_HV: C1.1 C4.1 C15.1 C17.1 C18.1 D1.1 D2.1 IC1.1 PS1.6 | length 46.8
  Top Copper w0.5: IC1.1 35.25,30.905 34.8,31.355 C4.1 C1.1 v1(34.8,39.104) 36.696,41 42.5,41 44.3,42.8 44.3,46.35 44.3,48.85 44.3,49.8 48,53.5 PS1.6
  Bottom Copper w0.5: v1(29.5,29) 29.5,34.5 33.972,38.972 34.669,38.972 v1(34.8,39.104)
+5V_LV: C2.2 C5.2 C6.1 C16.1 C19.1 C20.1 IC1.8 IC2.3 IC2.7 PS2.6 | length 73.2
  Top Copper w0.5: IC1.8 IC1.8@52.3,30.905 ; C2.2 52.304,36.396 52.304,36.868 56.436,41 v1(60,41) PS2.6 ; C2.2@52.3,36.296 IC1.8@52.3,30.905 ; IC1.8@52.8,30.98 52.725,30.905 IC1.8@52.3,30.905 ; IC2.7@74.243,31.657 74.243,29.757 75.5,28.5 ; IC2.3@75.513,26.757 75.513,28.487 75.5,28.5 ; v1(83.164,28.919) 82.955,28.919 82.505,28.469 81.471,28.469 C6.1 81.271,28.469 80.57,28.469 80.539,28.5 75.5,28.5
  Bottom Copper w0.5: v1(60,41) 60,39 70.081,28.919 v1(83.164,28.919)
GND_HV: C1.2 C4.2 C15.2 C17.2 C18.2 PS1.4
  other v1: 36,24 37.5,36 36.5,43.5 47,47.5
GND_IN: C12.2 C13.2 C14.2 J2.MH1 J2.MH2 J3.MH1 J3.MH2 J7.1 PS1.2 PS2.2
  other v1: 81,13 64.5,13.5 104.5,18.5 91,42 103,48 102.5,69
GND_LV: C2.1 C5.1 C6.2 C7.1 C9.1 C10.2 C16.2 C19.2 C20.2 IC1.5 IC2.6 PS2.4 | length 0.1
  Top Copper w0.5: C6.2@81.293,29.691 C6.2
  other v1: 68.5,21 53.5,25 61,29 66.5,29 79.436,30.232 57,37.5 68,38 54.5,42.5 55.5,54
NetC3_1: C3.1 C7.2 IC2.8 R2.1 R6.2 | length 19.6
  Top Copper w0.5: R6.2@60.9,31.578 64.5,31.578 ; C7.2 64.5,31.578 ; IC2.8 IC2.8@72.96,31.578 ; R2.1 73.6,35.8 74.3,35.1 C3.1 74.3,34.9 72.96,33.56 IC2.8@72.96,31.578 ; 64.5,31.578 IC2.8@72.96,31.578
NetC3_2: C3.2 IC2.5 R2.2 R7.1 | length 12
  Top Copper w0.5: R2.2 76.4,35.8 75.7,35.1 C3.2 75.7,34.9 76.77,33.83 IC2.5 ; IC2.5@76.783,31.657 R7.1@82.052,31.657
NetC8_1: C8.1 D2.2 IC1.3 IC1.4 J4.1 J4.2 J4.3 J4.4 J4.5 J4.6 J4.7 J4.8 J4.9 J4.10 J4.11 J4.12 J4.13 J4.14 J4.15 J4.16 J4.17 J4.18 J4.19 J4.20 J4.21 J4.22 J4.23 J4.24 J4.25 R9.1 | length 26.5
  Top Copper w0.5: R9.1 20.823,25.387 22.958,25.387 ; C8.1 24,26.428 22.958,25.387 ; D2.2 31.5,25.387 ; IC1.3@35.788,28.365 35.788,27.095 35.788,26.288 34.887,25.387 31.5,25.387 ; 22.958,25.387 31.5,25.387
  Top Copper w1: J4.25@20.703,20.54 R9.1
NetC8_2: C8.2 D1.2 IC1.2 R5.1 R8.2 | length 25.7
  Top Copper w0.5: R8.2 23.5,32.556 ; C8.2 24,32.056 23.5,32.556 ; D1.2 31.5,32.556 ; IC1.2 34.365,29.635 33.5,30.5 33.5,31.5 32.444,32.556 31.5,32.556 ; 23.5,32.556 31.5,32.556
  Top Copper w0.8: R8.2 R5.1
NetC9_2: C9.2 IC2.2 | length 6.2
  Top Copper w0.5: C9.2 73.243,29.257 74.243,28.257 IC2.2@74.243,26.757
NetC10_1: C10.1 C11.1 IC2.1 R11.2 R12.1 | length 19.6
  Top Copper w0.5: R11.2@60.9,26.078 64.5,26.078 IC2.1@72.96,26.078 ; 64.5,26.065 C10.1 ; IC2.1 IC2.1@72.96,26.078 ; IC2.1@72.973,26.6 IC2.1@72.973,26.757 ; R12.1 73.6,22.7 73.85,22.95 74.3,23.4 C11.1 ; C11.1@74.11,23.7 72.96,24.85 IC2.1@72.96,26.078
NetC11_2: C11.2 IC2.4 R10.1 R12.2 | length 12.5
  Top Copper w0.5: C11.2 75.7,23.4 76.4,22.7 R12.2 ; C11.2@75.7,23.6 76.77,24.67 IC2.4 ; IC2.4@76.783,26.6 76.783,26.225 76.808,26.2 R10.1@82.192,26.2
NetIC1_6: IC1.6 R11.1 | length 6.9
  Top Copper w0.5: IC1.6 53.865,28.365 56.23,26 R11.1
NetIC1_7: IC1.7 R6.1 | length 6.7
  Top Copper w0.5: IC1.7 53.865,29.635 55.73,31.5 R6.1
NetJ1_1: J1.1 J1.2 J1.3 J1.4 J1.5 J1.6 J1.7 J1.8 J1.9 J1.10 J1.11 J1.12 J1.13 J1.14 J1.15 J1.16 J1.17 J1.18 J1.19 J1.20 J1.21 J1.22 J1.23 J1.24 J1.25 R1.2 | length 4
  Top Copper w1: J1.5 20.703,62.297 R1.2
NetR1_1: R1.1 R3.2 | length 3.2
  Top Copper w0.8: R3.2 R1.1
NetR3_1: R3.1 R4.2 | length 3.2
  Top Copper w0.8: R4.2 R3.1
NetR4_1: R4.1 R5.2 | length 3.2
  Top Copper w0.8: R5.2 R4.1
NetR8_1: R8.1 R9.2 | length 3
  Top Copper w0.5: R9.2 R8.1
V_OUT_N: J2.6 J3.8 J5.1 R7.2 | length 99.3
  Top Copper w0.381: R7.2 83.492,31.775 83.726,31.541 83.776,31.541 85.83,29.487 90.747,29.487 91,29.74 ; v1(91,31) 91,29.74 ; J3.8 114.18,54.439 114.786,53.833 114.786,52.98 91.762,29.956 91.762,29.933 91.493,29.664 91.075,29.664 91,29.74
  Bottom Copper w0.381: 90.777,29.567 90.198,29.567 89.159,28.528 89.159,19.303 93.893,14.568 93.893,14.252 J5.1 ; 91,29.791 v1(91,31) ; 91.04,29.567 101.413,29.567 105.907,34.062 107.765,35.92 108.294,36.449 108.48,36.635 114.305,36.635 115.4,35.54 115.4,32.038 116.128,31.31 J2.6
V_OUT_P: J2.1 J3.7 J5.S_1 J5.S_2 J5.S_3 R10.2 | length 97.9
  Top Copper w0.381: R10.2 83.492,26.366 85.977,28.852 90.723,28.852 ; v1(90.946,27.554) 90.946,28.628 90.723,28.852 ; J3.7 115.88,55.532 115.88,54.612 115.421,54.153 115.421,52.717 92.397,29.693 92.397,29.67 91.579,28.852 90.723,28.852
  Bottom Copper w0.381: v1(90.946,27.554) 91,27.609 91,28.709 90.777,28.932 ; J5.S_3 94.658,15.017 94.342,15.017 89.794,19.566 89.794,28.265 90.461,28.932 90.777,28.932 ; J2.1 114.347,33.382 114.542,33.382 114.765,33.605 114.765,35.277 114.042,36 108.743,36 106.17,33.427 101.676,28.932 90.777,28.932
pads on no net: J2.2 J2.3 J2.4 J2.5 J2.7 J2.8 J2.9 J3.1 J3.2 J3.3 J3.4 J3.5 J3.6 J3.9 J3.10 J3.11 J3.12 J3.MH3 J3.MH4 J6.2 J6.3 J6.4 J6.5 J7.2 J7.3 J7.4 J7.5 MH1. MH2. MH3. MH4. PS1.5 PS2.5

## Polygon pours and split planes (outlines as drawn)
GND_IN on Top Copper "GND_IN_L01_P052" (solid, remove dead copper, pour order 52): 45,55.5 47,55.5 53,55.5 53,6.5 57,2.5 122,2.5 122,75 45,75
GND_LV on Top Copper "Top Copper-GND_LV" (solid, remove dead copper, pour order 50): 50,24.5 56.5,18 81,18 85.5,22.5 87,22.5 87,36.5 85.5,36.5 82,40 63.169,40 62.3,40.869 62.3,60.7 61,62 58.5,62 52,55.5 52,41.37 50,38.926
GND_HV on Top Copper "Top Layer-GND_HV" (solid, remove dead copper, pour order 47): 39,37.5 40.5,39 43.5,39 50.072,45.572 50.072,60.928 49,62 46.5,62 44,59.5 44,53 33.5,42.5 33.5,24.5 35,23 37.5,23 39,24.5
V_OUT_P on Top Copper "V_OUT_P_L01_P016" (solid, remove dead copper, pour order 16): 98.695,16.826 96.695,18.826 89.695,18.826 86.695,15.826 86.695,9.326 89.195,6.826 96.695,6.826 98.695,8.826
NetC8_1 on Top Copper "GND_Plane" (solid, remove dead copper, pour order 9): 8.745,22.5 22.495,22.5 22.495,8.5 8.745,8.5
24V_IN on Top Copper "24V_IN_L01_P043" (solid, remove dead copper, pour order 43): 80,50 81.5,48.5 94.5,48.5 95.5,49.5 95.5,62 88,69.5 47,69.5 46,68.5 46,67.5 46.5,67 76.5,67 80,63.5
+5V_HV on Top Copper "+5V_HV_L01_P042" (solid, remove dead copper, pour order 42): 28.5,29.725 29.1,30.325 32.05,30.325 32.5,29.875 32.5,28.125 32.1,27.725 29,27.725 28.5,28.225
NetJ1_1 on Top Copper "GND_Plane" (solid, remove dead copper, pour order 8): 7.915,74.327 21.665,74.327 21.665,60.327 7.915,60.327
GND_IN on Bottom Copper "GND_IN_L02_P051" (solid, remove dead copper, pour order 51): 45,75 122,75 122,2.5 45,2.5
V_OUT_P on Bottom Copper "V_OUT_P_L02_P049" (solid, remove dead copper, pour order 49): 98.695,16.826 96.695,18.826 89.695,18.826 86.695,15.826 86.695,9.326 89.195,6.826 96.695,6.826 98.695,8.826
GND_LV on Bottom Copper "Top Copper-GND_LV" (solid, remove dead copper, pour order 48): 50,24.5 56.5,18 81,18 85.5,22.5 87,22.5 87,36.5 85.5,36.5 82,40 63.169,40 62.3,40.869 62.3,60.7 61,62 58.5,62 52,55.5 52,41.37 50,38.926
GND_HV on Bottom Copper "Top Layer-GND_HV" (solid, remove dead copper, pour order 35): 33.5,24.5 35,23 37.5,23 39,24.5 39,37.5 40.5,39 43.5,39 50.072,45.572 50.072,60.928 49,62 46.5,62 44,59.5 44,53 33.5,42.5
NetC8_1 on Bottom Copper "GND_Plane" (solid, remove dead copper, pour order 7): 8.745,22.5 22.495,22.5 22.495,8.5 8.745,8.5
24V_IN on Bottom Copper "24V_IN_L02_P038" (solid, remove dead copper, pour order 38): 80,50 81.5,48.5 94.5,48.5 95.5,49.5 95.5,62 88,69.5 47,69.5 46,68.5 46,67.5 46.5,67 76.5,67 80,63.5
NetJ1_1 on Bottom Copper "GND_Plane" (solid, remove dead copper, pour order 6): 7.915,74.327 21.665,74.327 21.665,60.327 7.915,60.327

## Silkscreen, mask and mechanical layers (free items; w line width, h text height)
Top Overlay:
  text "+5V" at 101.746,80.746 h1.52 r180
  text "GND" at 62.246,80.246 h1.52 r180
  text "HV" at 46.754,71.754 h1.52
  text "LV" at 59.254,71.754 h1.52
  text "max input voltage:" at 10.262,56.746 h1.52 r270
  text "RJ45" at 99.13,55.518 h1.52 r90
  text "PIN 8" at 102.246,55.254 h1.52 r90
  text "PIN 7" at 105.246,55.254 h1.52 r90
  text "800 VDC" at 7.754,46.746 h1.52 r270
  text "V_OUT_N" at 88.754,32.508 h1.52
  text "V_OUT_P" at 88.754,25.008 h1.52
  text "D-Sub" at 103.246,24.754 h1.52 r90
  text "PIN 6" at 106.246,24.754 h1.52 r90
  text "PIN 1" at 109.246,24.754 h1.52 r90
  text "BNC" at 90.849,19.905 h1.52
  text "OUTPUT" at 103.246,7.754 h1.52 r90
  text "V_OUT_N ->" at 106.492,6.254 h1.52 r90
  text "V_OUT_P ->" at 109.492,6.254 h1.52 r90
  text "Schirm = P" at 81.519,4.254 h1.52
  text "Seele  = N" at 81.519,1.754 h1.52
Board:
  lines w0.254: 0,77.525 0,5 ccw(c5,5) 5,0 119,0 ccw(c119,5) 124,5 124,77.6 ccw(c119,77.6) 119,82.6 5.075,82.6 ; 0,77.6 cw(c5,77.6) 5,82.6

## Text inside footprints (layer, text, board x,y; h text height)
Serial1: Top Overlay "Serial-Nr." at 66.09,11.81 h1.5; Top Assembly "SerialNr" at 67,10.2 h0.7